# Altium PCB Car Power Supply.PcbDoc
Units mm, origin at the board's own origin, x right, y up, seen from the top; angles counter-clockwise.
Board outline 152.4 x 101.6 mm, 2 copper layers (Top Layer, Bottom Layer); 27 components, 15 nets, 67 pads, 3 vias.
Unrouted connection lines stored in the file: 12.
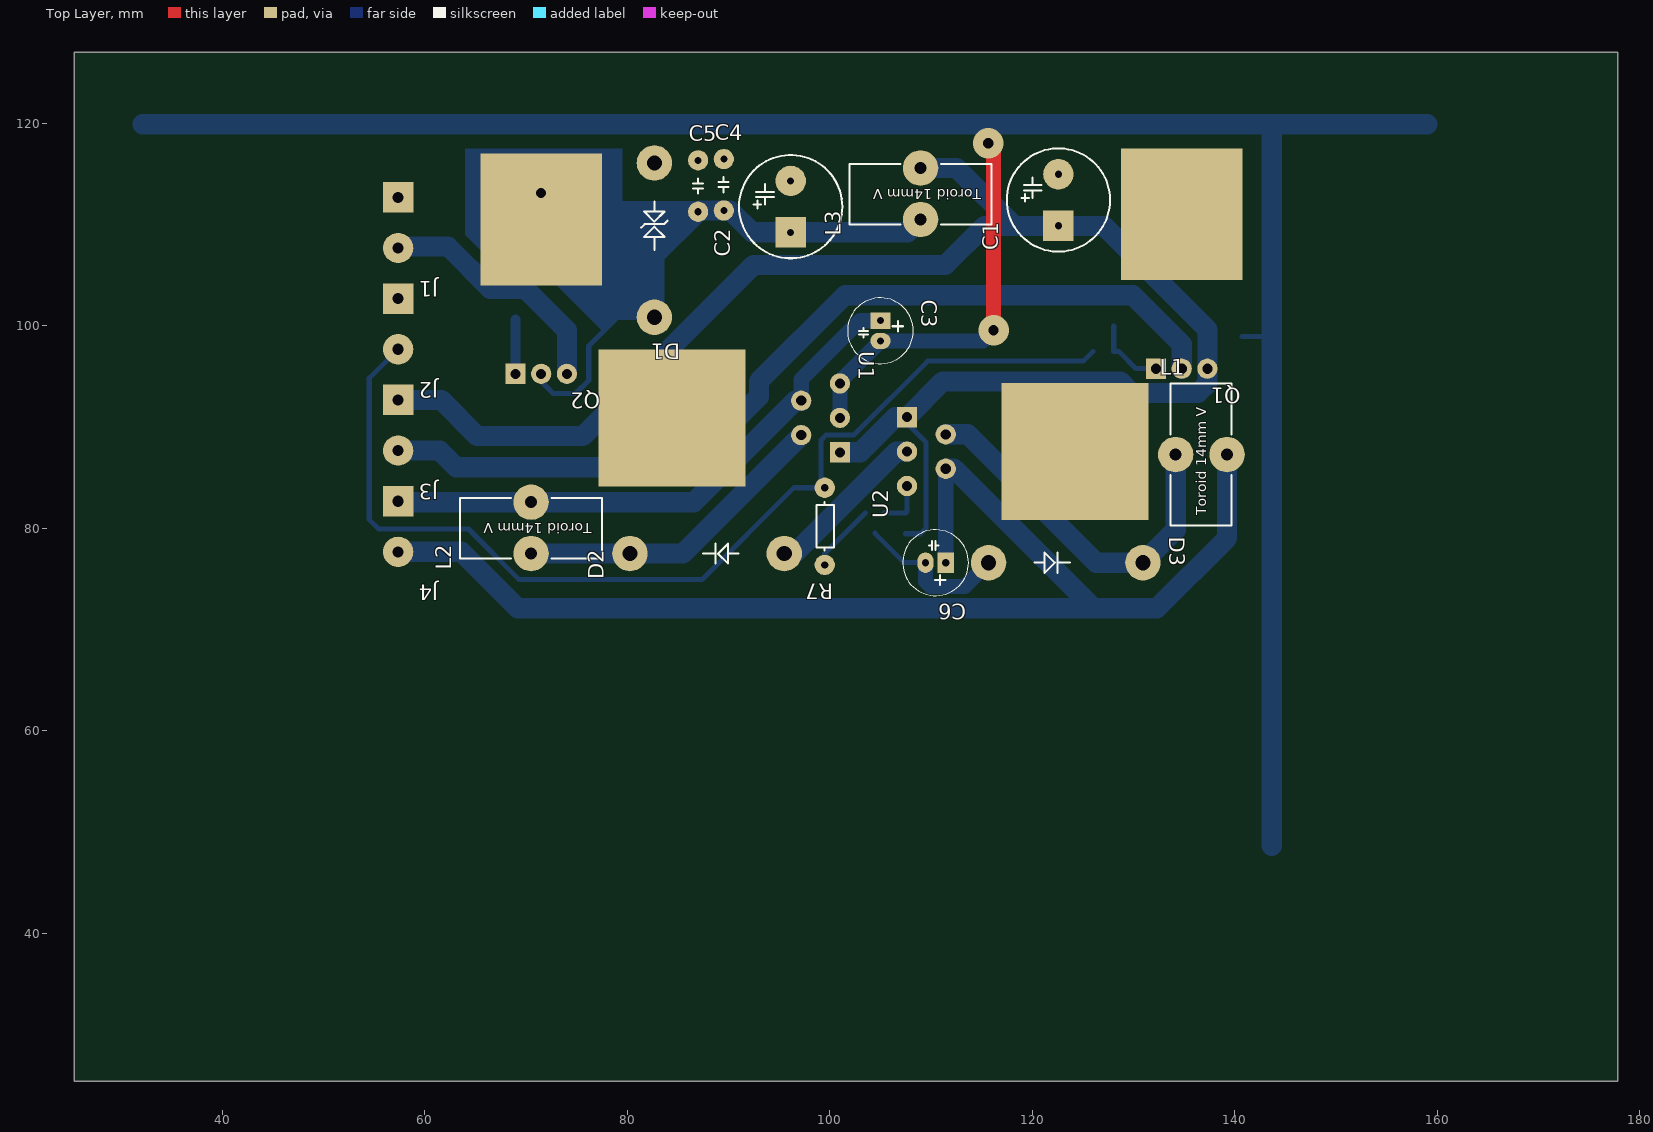
[diagram p0: Top Layer view]
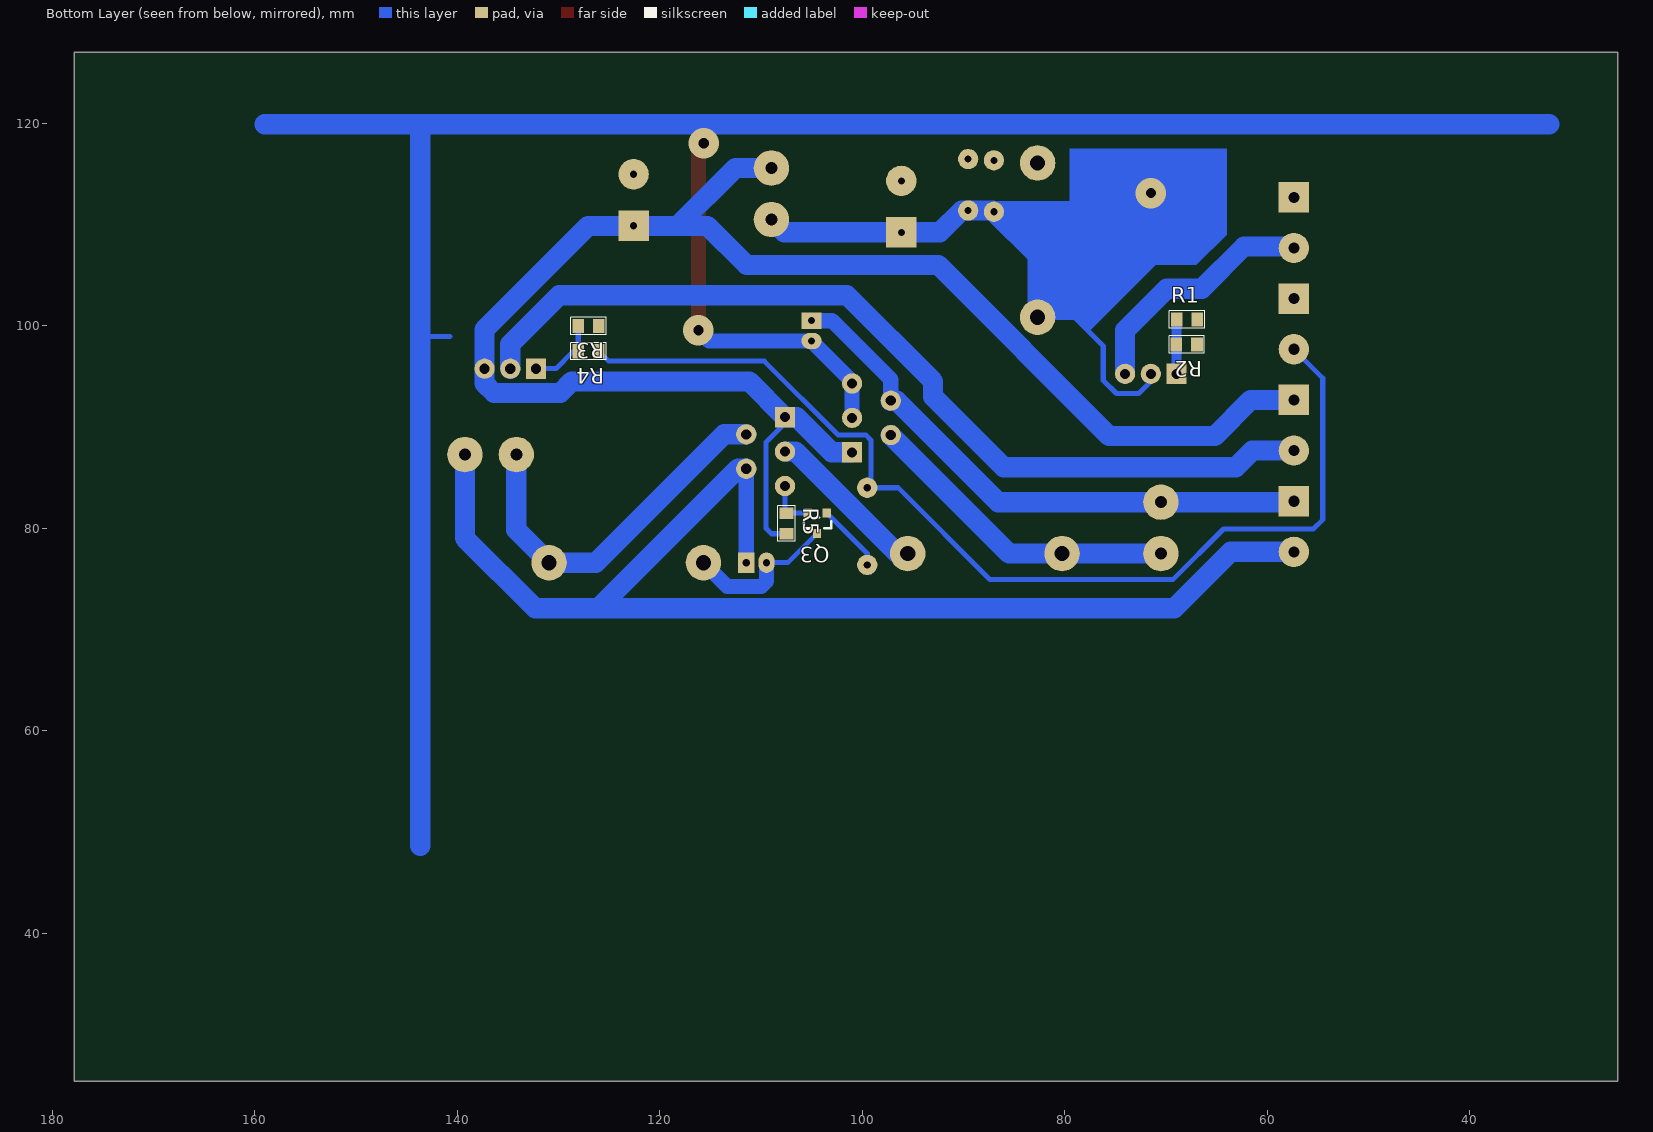
[diagram p1: Bottom Layer view, seen from below]
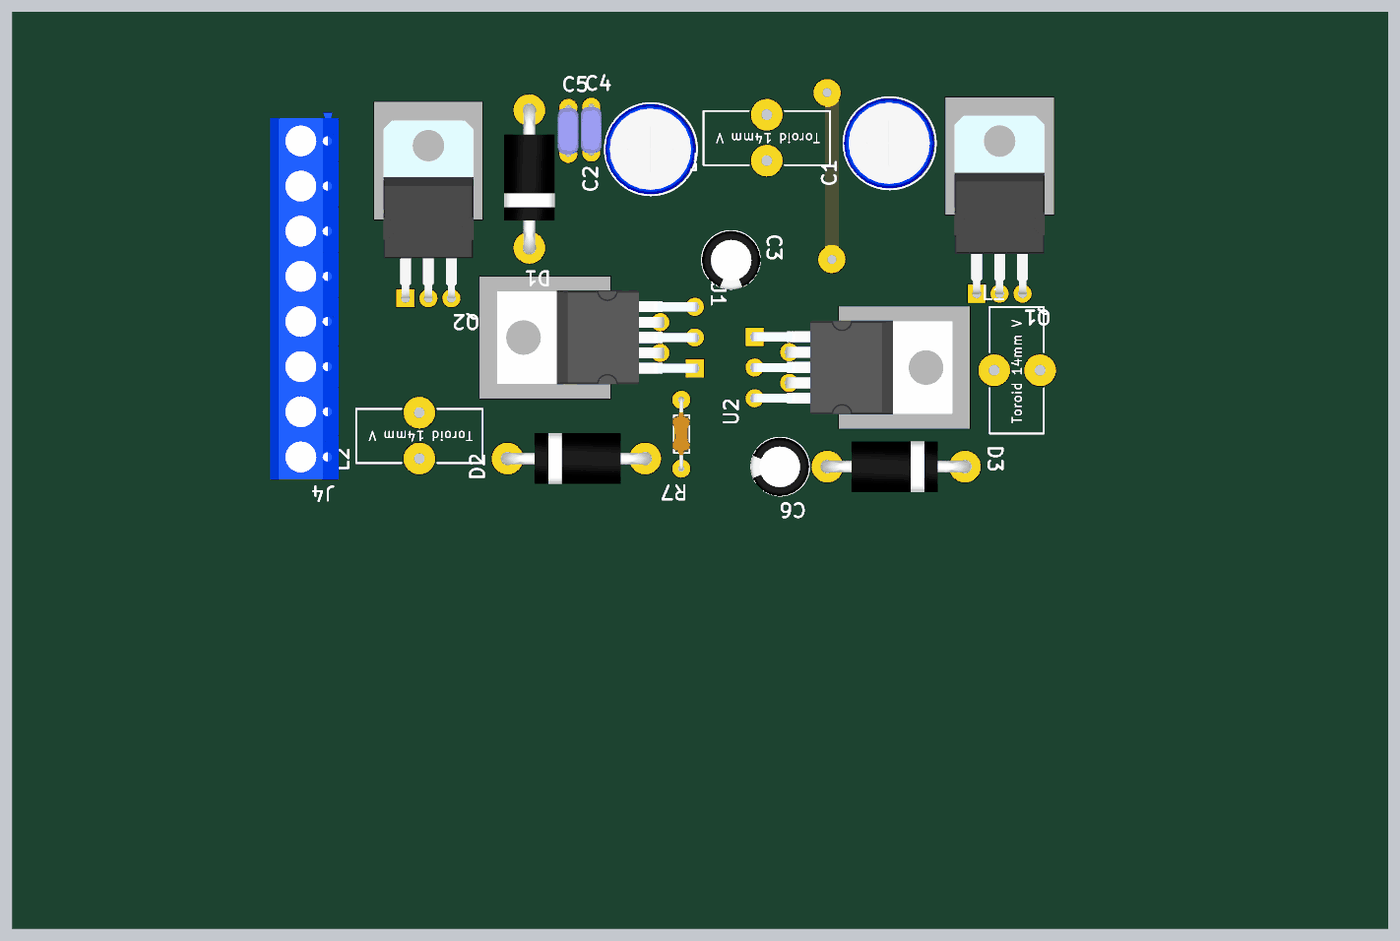
[diagram p2: 3D render of the assembled board from above, using the file's embedded part models]
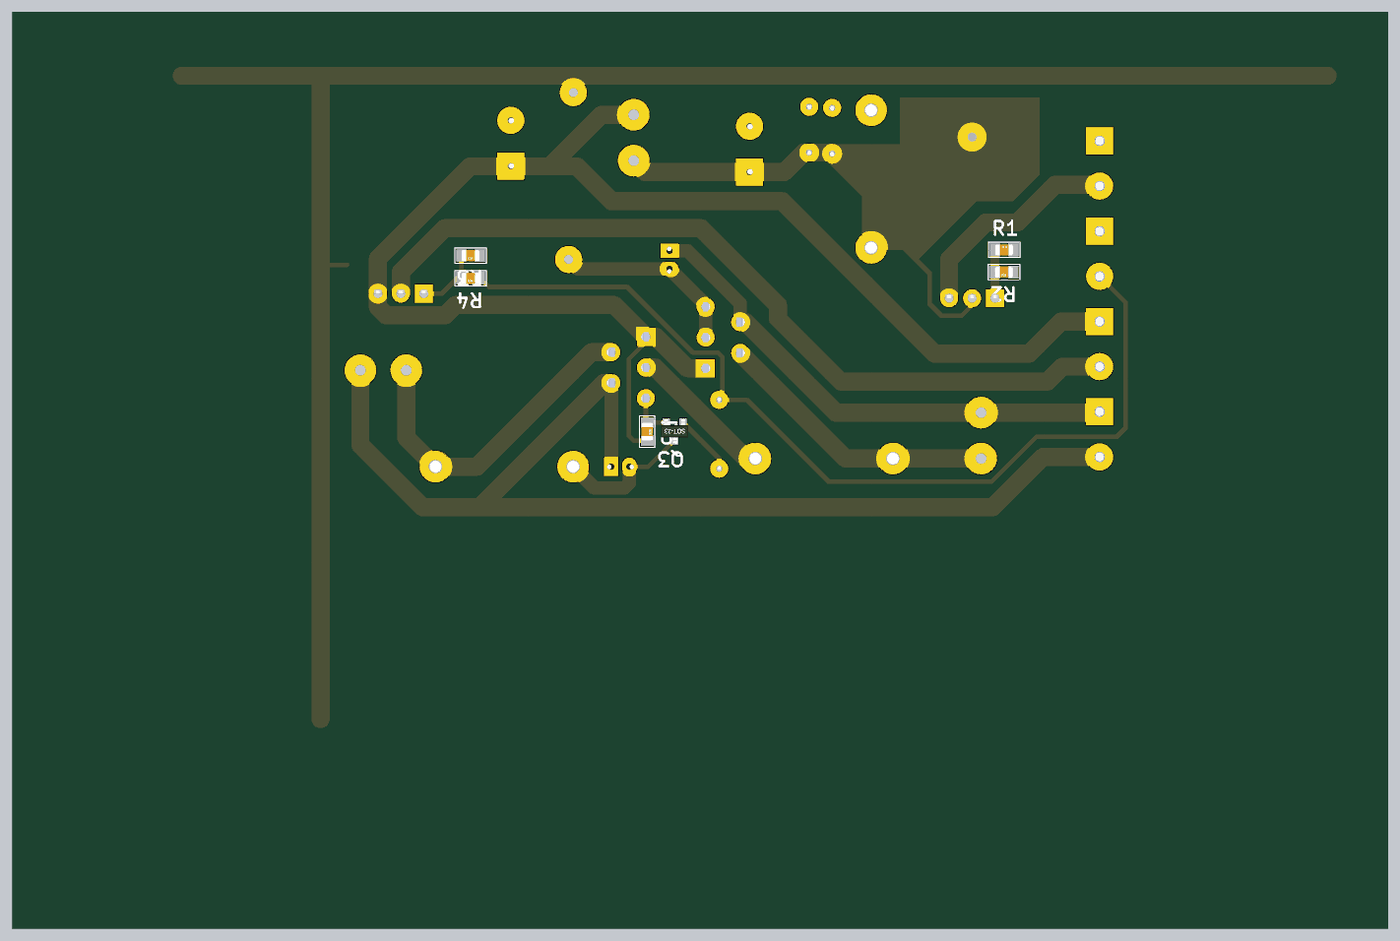
[diagram p3: 3D render of the assembled board from below, using the file's embedded part models]

## Layer stack, top to bottom
Top Solder: solder mask 0.0102, Solder Resist, Dk 3.5
Top Layer: signal copper 0.0356
Dielectric 1: dielectric 0.32, FR-4, Dk 4.8
Bottom Layer: signal copper 0.0356
Bottom Solder: solder mask 0.0102, Solder Resist, Dk 3.5

## Board outline
25.4,25.4 177.8,25.4 177.8,127 25.4,127

## Design rules (kind name [scope] priority, off if disabled: settings)
Clearance [All] p1: gap=0.4
ComponentClearance [All] p1: gap=0 collisioncheckmode=3 verticalgap=0 showdistances=FALSE
PolygonConnect [All] p1: connectstyle=Relief reliefconductorwidth=0.254 reliefentries=4 polygonreliefangle="90 Angle" airgapwidth=0.254
RoutingVias [All] p1: holewidth=0.711 width=1.27 viastyle="Through Hole" minholewidth=0.711 minwidth=1.27 maxholewidth=0.711 maxwidth=1.27
SolderMaskExpansion [All] p1: expansion=0.102
Width [All] p1: maxlimit=2 minlimit=0.2 preferedwidth=1
28 further rules are at their usual default settings.

## Components (designator, comment, footprint, x,y, rotation, side; value= is the part's Value field where it differs from the comment)
C1 "1000uF" "Cap E p5.08mm D10.2mm (3p)" 122.575,109.875 r90 top
C2 "1000uF" "Cap E p5.08mm D10.2mm (3p)" 96.139,109.22 r90 top
C3 "220uF 16V" "Cap E p2mm D6.5xH11" 105,100.5 r270 top
C4 "100n" "Cap P5.08MM (3p) disk2" 89.535,111.379 r90 top
C5 "10n" "Cap P5.08MM (3p) disk2" 86.995,111.252 r90 top
C6 "220uF 16V" "Cap E p2mm D6.5xH11" 111.45,76.6 r180 top
D1 "1.5KE20CA" "TVS diode DO-201" 82.677,116.078 r270 top
D2 "1N5822" "Diode DO-201" 95.5,77.5 r180 top
D3 "1N5822" "Diode DO-201" 115.675,76.6 r0 top
J1 "Connector" "DG301 5mm 2p" 57.375,112.675 r270 top
J2 "Connector" "DG301 5mm 2p" 57.375,102.675 r270 top
J3 "Connector" "DG301 5mm 2p" 57.375,92.675 r270 top
J4 "Connector" "DG301 5mm 2p" 57.375,82.675 r270 top
L1 "Inductor V" "Toroid V D14-W6" 134.15,87.275 r0 top
L2 "Inductor V" "Toroid V D14-W6" 70.5,77.5 r90 top
L3 "Inductor V" "Toroid V D14-W6" 108.966,110.49 r90 top
Q1 "TIP127" "TO220-2 Horisontal" 132.207,95.758 r270 top
Q2 "TIP127" "TO220-2 Horisontal" 68.961,95.25 r270 top
Q3 "BSS138" SOT-23 103.5,81.5 r0 bottom
R1 "10k" "SMD 0805 (2012)" 68.961,100.584 r180 bottom
R2 "1kOm" "SMD 0805 (2012)" 66.929,98.171 r0 bottom
R3 "10k" "SMD 0805 (2012)" 126,100 r0 bottom
R4 "1kOm" "SMD 0805 (2012)" 126,97.5 r0 bottom
R5 "10k" "SMD 0805 (2012)" 107.5,81.5 r270 bottom
R7 "1 kOm" "Res p7.62 (4p) 0.25w" 99.5,84 r270 top
U1 "LM2596T-5.0" "TO220-5 Horisontal" 101,87.5 r0 top
U2 "LM2596T-5.0" "TO220-5 Horisontal" 107.625,90.975 r180 top

## Footprints (in the part's own frame and the unit in brackets; to place one, negate y for a bottom-side part, rotate by r counter-clockwise, add the part's x,y. Pads: shape width x height; smd on the part's side, far side on the other; paste and mask are expansions set on the pad)
"Cap E p2mm D6.5xH11" [mm] "D 6.5mm; H 11mm"
  rect 1.6x2 hole 0.7: 1(0,0)
  oval 1.6x2 hole 0.7: 2(2,0)
  silkscreen extent -2.25,-3.25 4.25,3.25, body extent -2.22,-3.22 4.27,3.28, height 11.49
"Cap E p5.08mm D10.2mm (3p)" [mm] "D 10.2mm; H 17.5mm, Hole: 0.7mm"
  rect 3x3 hole 0.7: 1(0,0)
  round 3 hole 0.7: 2(5.08,0)
  silkscreen extent -2.56,-5.1 7.64,5.1, body extent -2.49,-4.97 7.57,5.08, height 16.53
"Cap P5.08MM (3p) disk2" [mm]
  round 2 hole 0.7: 1(0,0) 2(5.08,0)
  silkscreen extent 1.8,-0.48 3.3,0.53, body extent -0.29,-1.12 5.29,1.16, height 6.04
"DG301 5mm 2p" [mm]
  rect 3x3 hole 1.1: 1(0,0)
  round 3 hole 1.1: 2(5,0)
  body extent -3.1,-3.4 7.5,4.2, height 10
"Diode DO-201" [mm] "p6"
  round 3.5 hole 1.5: A(0,0) K(15.24,0)
  silkscreen extent 4.54,-1 8.04,1, body extent -0.66,-2.8 15.9,2.8, height 7.6
"Res p7.62 (4p) 0.25w" [mm] "L p7.62; horisontal"
  round 2 hole 0.7: 1(0,0) 2(7.62,0)
  silkscreen extent 1.4,-0.8 6.2,0.9, body extent -0.3,-1 7.8,1, height 2.1
"SMD 0805 (2012)" [mil]
  rect 45x55 smd: 1(0.35,0.98) 2(80.35,0.98)
  silkscreen extent -29,-32 109,34, body extent 1,-24 80,26, height 31
SOT-23 [mm]
  rect 0.8x0.9 smd: 1(0,0) 2(1.875,0) 3(0.95,2)
  silkscreen extent -0.45,0.45 2.27,1.53, body extent -0.57,-0.32 2.43,2.32, height 1.08
"TO220-2 Horisontal" [mm]
  rect 2x2 hole 1: 1(0,0)
  rect 13x12 smd: 2(-15.24,2.54)
  round 2 hole 1: 2(0,2.54) 3(0,5.08)
  body extent -19.7,-2.46 0,7.54, height 4.6
"TO220-5 Horisontal" [mm]
  rect 2x2 hole 1: 1(0,0)
  round 2 hole 1: 2(-3.825,1.7) 3(0,3.4) 4(-3.825,5.1) 5(0,6.8)
  rect 14.5x13.5 smd: 11(-16.575,3.4)
  body extent -21.9,-1.8 0.33,8.6, height 5
"Toroid V D14-W6" [mm] "10mm Black ring TEC.ORG"
  round 3.5 hole 1.2: 1(0,0) 2(5.08,0)
  silkscreen extent -0.5,-7 5.5,7
"TVS diode DO-201" [mm] "6p, p15.24mm"
  round 3.5 hole 1.5: 1(0,0) 2(15.24,0)
  silkscreen extent 3.8,-1.3 8.6,1.3, body extent -0.66,-2.8 15.9,2.8, height 7.6

## Part data
C1 C2: library part "Cap E 1000mF x 25V", "Capacitor"
C3 C6: library part "Cap E 220mF x 16V", "Capacitor"
C4 C5: library part "Cap Ceramic", "Capacitor"
D1: library part "TVS 1.5KE20CA", "1500W Transil (TVS Diode)"
D2 D3: library part "D Shotki 1N5822", "3 Amp Shotki  Diode"
J1 J2 J3 J4: library part DG301-5.0-2P12, "DG301 series"
L1 L2 L3: "Inductor Vertical"
Q1 Q2: "PNP Darlington Bipolar Transistor"
Q3: "N-Channel 50V - 0.7-1? - 0.22A"
R1 R2 R3 R4 R5: library part "Res SMD 0805"
R7: library part "Res All Types"
U1 U2: "Voltage Regulator"

## Via types
v1: diameter 3, hole 1, Top Layer to Bottom Layer, 3 vias

## Nets (pads, with @x,y where several pads share a name; then routed paths per layer and width w, separated by ;. In a path a pad name is that pad's centre, name@x,y a point inside that pad or via, vN(x,y) a via of type N, cw(c..) or ccw(c..) an arc to the next point about the centre after c; other vN are vias at no path point)
"+5V ENGINE": C6.1 J4.2 L1.2 U2.4 | length 124.9
  Bottom Layer w1.5: C6.1 U2.4
  Bottom Layer w2: J4.2 63.625,77.675 69.2,72.1 126.05,72.1 ; U2.4 112.275,85.875 126.05,72.1 ; L1.2 139.23,79.03 132.3,72.1 126.05,72.1
"+5V INGITION": C3.1 J4.1 L2.2 U1.4 | length 56.3
  Bottom Layer w1.5: U1.4 97.175,94.675 103,100.5 C3.1
  Bottom Layer w2: J4.1@57.375,82.58 L2.2 86.58,82.58 96.6,92.6 U1.4
"+12 V RAW": C2.1 C4.1 C5.1 D1.2 L3.1 Q2.2 | length 53.2
  Bottom Layer w0.5: Q2.2@71.501,95.25 71.501,94.499 72.7,93.3 74.9,93.3 76.2,94.6 76.2,98 79.038,100.838 D1.2
  Bottom Layer w2: D1.2 82.677,106.934 C5.1 87.122,111.379 C4.1 90.17,111.379 92.329,109.22 C2.1 107.696,109.22 L3.1
  other v1: 71.5,113.1
+12V: J1.2 Q2.3 | length 24.4
  Bottom Layer w2: J1.2@57.375,107.825 62.3,107.825 66.475,103.65 69.95,103.65 74.041,99.559 Q2.3
"+12V INGITION": J3.2 Q1.2 | length 90.4
  Bottom Layer w2: J3.2 61.475,87.675 63.125,86.025 86.025,86.025 93,93 93,94.5 101.5,103 129.925,103 134.747,98.178 Q1.2@134.747,95.758
"+12V NO NOISE": C1.1 J3.1 L3.2 Q1.3 R5.2 U1.1 U2.1 | length 165.3
  Bottom Layer w0.5: R5.2 108.959,79.459 109.5,80 109.5,88.5 107.625,90.375 U2.1
  Bottom Layer w2: J3.1 61.625,92.675 65.2,89.1 75.6,89.1 92.5,106 111.425,106 115.28,109.855 118.237,109.855 ; U1.1 103,87.5 106.475,90.975 U2.1 111.15,94.5 128.683,94.5 129.825,93.358 136.358,93.358 137.287,94.287 Q1.3 137.287,99.638 127.07,109.855 118.237,109.855 ; L3.2 112.522,115.57 118.237,109.855
GND: C1.2 C2.2 C3.2 C4.2 C5.2 C6.2 D1.1 D2.A D3.A J1.1 Q3.3 R1.2 R3.1 U1.3 U1.5 U2.3 | length 271.5
  Top Layer w1.5: v1(116.175,99.55) v1@116.175,117.5
  Bottom Layer w0.5: Q3.3@104.459,79.509 Q3.3 107.35,76.6 C6.2 ; 140.7,98.95 143.487,98.95
  Bottom Layer w1.5: U1.3 U1.5 101,94.5 C3.2 115.125,98.5 v1(116.175,99.55) ; C6.2 109.45,74.775 109.975,74.25 113.325,74.25 D3.A
  Bottom Layer w2: 32.131,119.888 159.004,119.888 ; D2.A 96.5,77.5 106.575,87.575 U2.3 ; 143.637,48.641 143.637,119.888
  other v1: 115.65,118.025
NetD2_K: D2.K L2.1 U1.2 | length 31.5
  Bottom Layer w2: L2.1 D2.K 85.475,77.5 U1.2
NetD3_K: D3.K L1.1 U2.2 | length 36.7
  Bottom Layer w2: U2.2 113.625,89.275 126.3,76.6 D3.K 134.15,79.835 L1.1
NetQ1_1: Q1.1 R3.2 R4.2 | length 7.4
  Bottom Layer w0.5: R3.2 R4.2 128.525,97.475 130.242,95.758 Q1.1
NetQ2_1: Q2.1 R1.1 R2.2 | length 5.4
  Bottom Layer w1: R1.1 68.961,100.6 Q2.1
NetQ3_1: Q3.1 R7.2 | length 6.8
  Bottom Layer w0.5: R7.2 99.5,77.5 Q3.1
NetQ3_2: Q3.2 R5.1 U2.5 | length 5
  Bottom Layer w0.5: Q3.2@105.416,81.541 Q3.2 107.484,81.5 107.625,81.641 U2.5 U2.5@107.525,84.075
"ON ENGINE": J2.2 R4.1 R7.1 | length 104.5
  Bottom Layer w0.5: J2.2 54.525,94.825 54.525,80.85 55.45,79.925 64.325,79.925 69.325,74.925 87.375,74.925 96.45,84 R7.1 99.15,84.35 99.15,88.725 99.65,89.225 102.392,89.225 109.667,96.5 125.034,96.5 R4.1
"ON INGITION": J2.1 R2.1
pads on no net: U1.11 U2.11

## Other copper
Bottom Layer:
  region net "+12 V RAW": 64,117.5 79.5,117.5 79.5,112.3 87.4,112.3 82.5,107 82.677,100.838 79.038,100.838 77.619,99.419 71,106 67,106 64,109

## Text inside footprints (layer, text, board x,y; h text height)
L1: Top Overlay "Toroid 14mm V" at 137.15,81.275 h1 r90
L2: Top Overlay "Toroid 14mm V" at 76.5,80.5 h1 r180
L3: Top Overlay "Toroid 14mm V" at 114.966,113.49 h1 r180